# Altium PCB IR SENSOR.PcbDoc
Units mm, origin at the board's own origin, x right, y up, seen from the top; angles counter-clockwise.
Board outline 152.4 x 101.6 mm, 2 copper layers (Top Layer, Bottom Layer); 10 components, 8 nets, 28 pads, 0 vias.
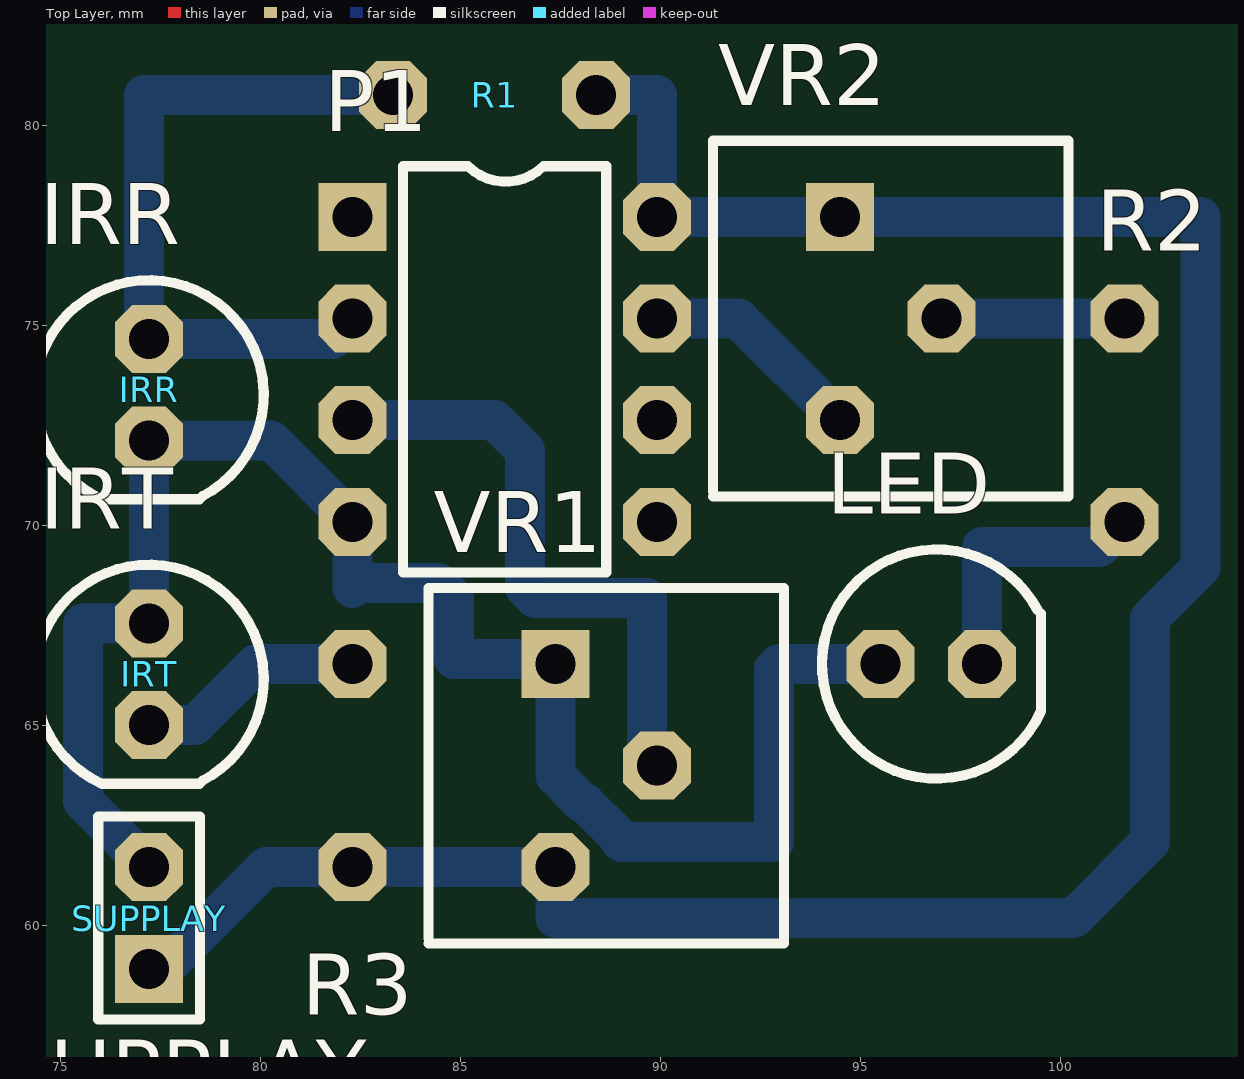
[diagram p0: Top Layer view]
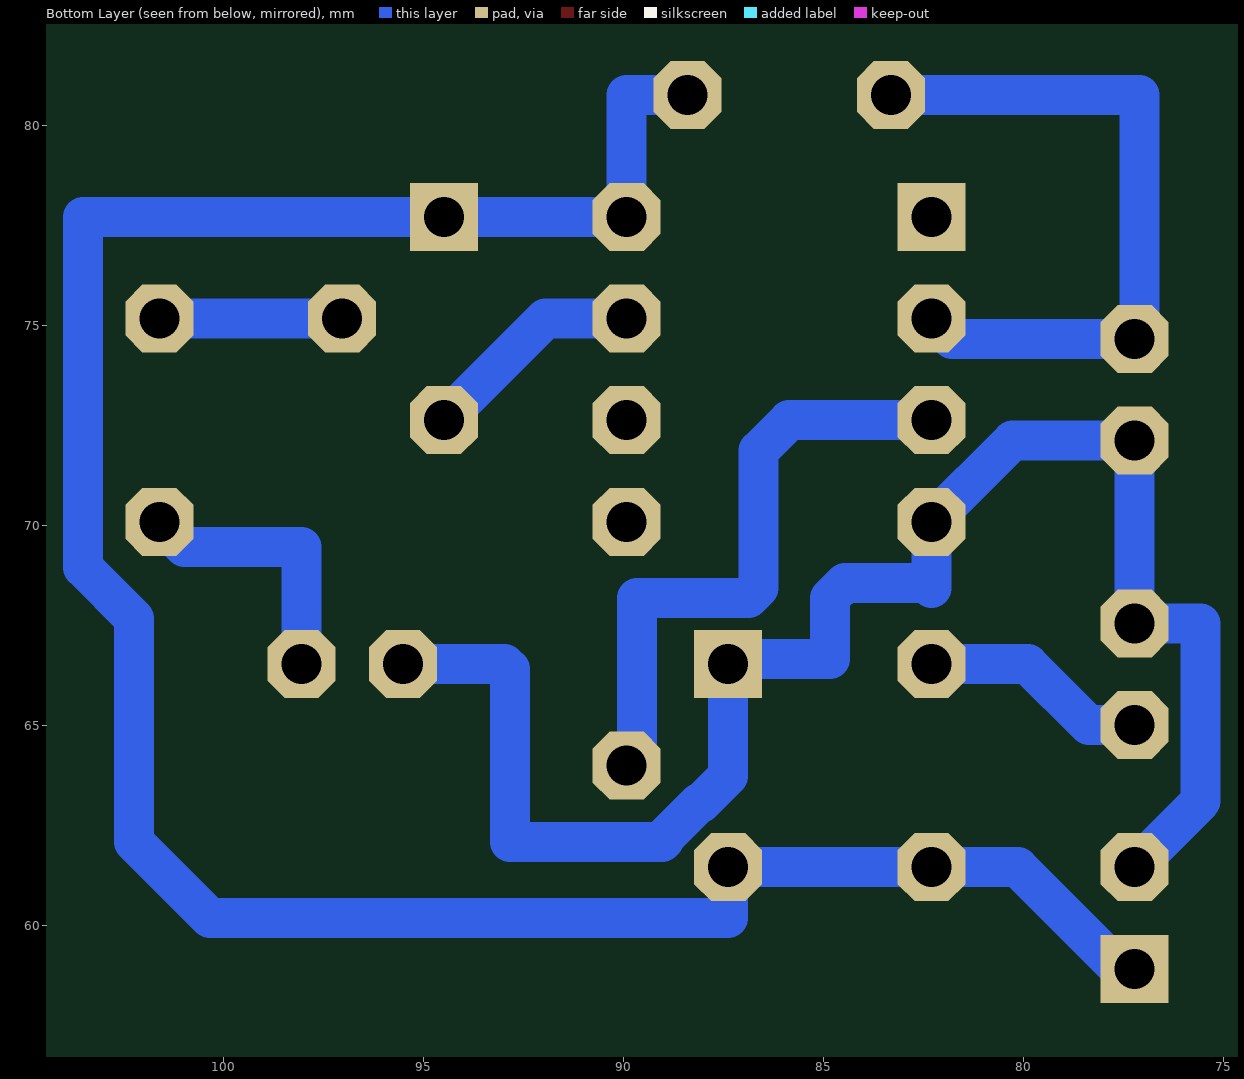
[diagram p1: Bottom Layer view, seen from below]

## Layer stack, top to bottom
Top Layer: signal copper 0.0356
Dielectric: dielectric 0.32, FR-4, Dk 4.8
Bottom Layer: signal copper 0.0356

## Board outline
25.4,25.4 177.8,25.4 177.8,127 25.4,127

## Design rules (kind name [scope] priority, off if disabled: settings)
Clearance [All] p1: gap=0.254
PolygonConnect [All] p1: connectstyle=Relief reliefconductorwidth=0.254 reliefentries=4 polygonreliefangle="90 Angle"
RoutingVias [All] p1: holewidth=0.711 width=1.27 viastyle="Through Hole" minholewidth=0.711 minwidth=1.27 maxholewidth=0.711 maxwidth=1.27
SilkscreenOverComponentPads [All] p1: minsilkscreentomaskgap=0.254
SolderMaskExpansion [All] p1: expansion=0.102
Width [All] p1: maxlimit=1 minlimit=1 preferedwidth=1
27 further rules are at their usual default settings.

## Components (designator, comment, footprint, x,y, rotation, side; value= is the part's Value field where it differs from the comment)
IRR "" LED-GREEN 77.216,72.136 r90 top
IRT "" LED-GREEN 77.216,65.024 r90 top
LED "" LED-GREEN 98.044,66.548 r180 top
P1 "LM358" dip-8pin 82.296,77.724 r0 top
R1 "10K" "res- 2.54x3" 83.312,80.772 r0 top
R2 "330" "res- 2.54x3" 101.6,75.184 r270 top
R3 "100" "res- 2.54x3" 82.296,66.548 r270 top
SUPPLAY "" bergstrip-2pin 77.216,58.928 r0 top
VR1 "10K" reg-variable 89.916,64.008 r270 top
VR2 "4.7K" reg-variable 97.028,75.184 r270 top

## Footprints (in the part's own frame and the unit in brackets; to place one, negate y for a bottom-side part, rotate by r counter-clockwise, add the part's x,y. Pads: shape width x height; smd on the part's side, far side on the other; paste and mask are expansions set on the pad)
bergstrip-2pin [mm]
  rect 1.7x1.7 hole 1: 1(0,0)
  oct 1.7x1.7 hole 1: 2(0,2.54)
  silkscreen extent -1.27,-1.27 1.27,3.81, body extent -1.27,-1.27 1.27,3.81, height 9.89
dip-8pin [mm]
  rect 1.7x1.7 hole 1: 1(0,0)
  oct 1.7x1.7 hole 1: 2(0,-2.54) 3(0,-5.08) 4(0,-7.62) 5(7.62,-7.62) 6(7.62,-5.08) 7(7.62,-2.54) 8(7.62,0)
  silkscreen extent 1.27,-8.89 6.35,1.27, body extent -0.13,-8.89 7.75,1.27, height 2.51
LED-GREEN [mm]
  oct 1.7x1.7 hole 1: 1(0,0) 2(2.54,0)
  silkscreen extent -1.47,-2.86 4.01,2.86, body extent -1.64,-2.67 3.94,2.92, height 9
reg-variable [mm]
  rect 1.7x1.7 hole 1: 1(-2.54,-2.54)
  oct 1.7x1.7 hole 1: 2(0,0) 3(2.54,-2.54)
  silkscreen extent -4.45,-5.72 4.45,3.18, body extent -4.45,-5.72 4.45,3.18, height 5.1
"res- 2.54x3" [mm]
  oct 1.7x1.7 hole 1: 1(0,0) 2(5.08,0)
  body extent -0.51,-0.98 5.57,1.02, height 3

## Part data
IRR IRT LED: library part LED-GREEN, "Typical RED GaAs LED"
P1: library part "ATML 911 240C04PU27"
R1 R2 R3: library part "Resistor 2.54x3"
SUPPLAY: library part "BURG STRIP 2"
VR1 VR2: library part "Variable Resistor"

## Nets (pads, with @x,y where several pads share a name; then routed paths per layer and width w, separated by ;. In a path a pad name is that pad's centre, name@x,y a point inside that pad or via, vN(x,y) a via of type N, cw(c..) or ccw(c..) an arc to the next point about the centre after c; other vN are vias at no path point)
1: IRT.1 R3.1 | length 5.7
  Bottom Layer w1: IRT.1 78.359,65.024 79.883,66.548 R3.1
2: IRR.2 P1.2 R1.1 | length 17.7
  Bottom Layer w1: P1.2 81.788,74.676 IRR.2 77.089,74.803 77.089,80.772 R1.1
3: P1.3 VR1.2 | length 15.5
  Bottom Layer w1: P1.3 85.852,72.644 86.614,71.882 86.614,68.453 86.868,68.199 89.662,68.199 89.662,64.262 VR1.2
7: P1.7 VR2.3 | length 5.6
  Bottom Layer w1: P1.7 91.948,75.184 VR2.3
8: R2.1 VR2.2 | length 4.6
  Bottom Layer w1: VR2.2 R2.1
9: LED.1 R2.2 | length 6.7
  Bottom Layer w1: LED.1 98.044,69.469 100.965,69.469 R2.2
GND: IRR.1 IRT.2 LED.2 P1.4 SUPPLAY.2 VR1.1 | length 43.5
  Bottom Layer w1: SUPPLAY.2 75.565,63.119 75.565,67.564 IRT.2 IRR.1 80.264,72.136 P1.4 82.296,68.453 82.423,68.58 84.455,68.58 84.836,68.199 84.836,66.675 87.249,66.675 VR1.1 87.376,63.754 88.058,63.072 88.113,63.072 88.98,62.205 88.98,62.15 89.027,62.103 92.837,62.103 92.837,66.421 92.964,66.548 LED.2
VCC: P1.8 R1.2 R3.2 SUPPLAY.1 VR1.3 VR2.1 | length 62.4
  Bottom Layer w1: SUPPLAY.1 77.597,58.928 80.137,61.468 R3.2 VR1.3 87.376,60.198 100.33,60.198 102.235,62.103 102.235,67.691 103.505,68.961 103.505,77.724 VR2.1 P1.8 89.916,80.772 R1.2
pads on no net: P1.1 P1.5 P1.6